# Altium PCB OTP4.PcbDoc
Units mil, origin at the board's own origin, x right, y up, seen from the top; angles counter-clockwise.
Board outline 2025 x 365 mil, 4 copper layers (Top Layer, Internal Plane 1, Internal Plane 2, Bottom Layer), stack 30.634 mil thick; 24 components, 20 nets, 111 pads, 25 vias.
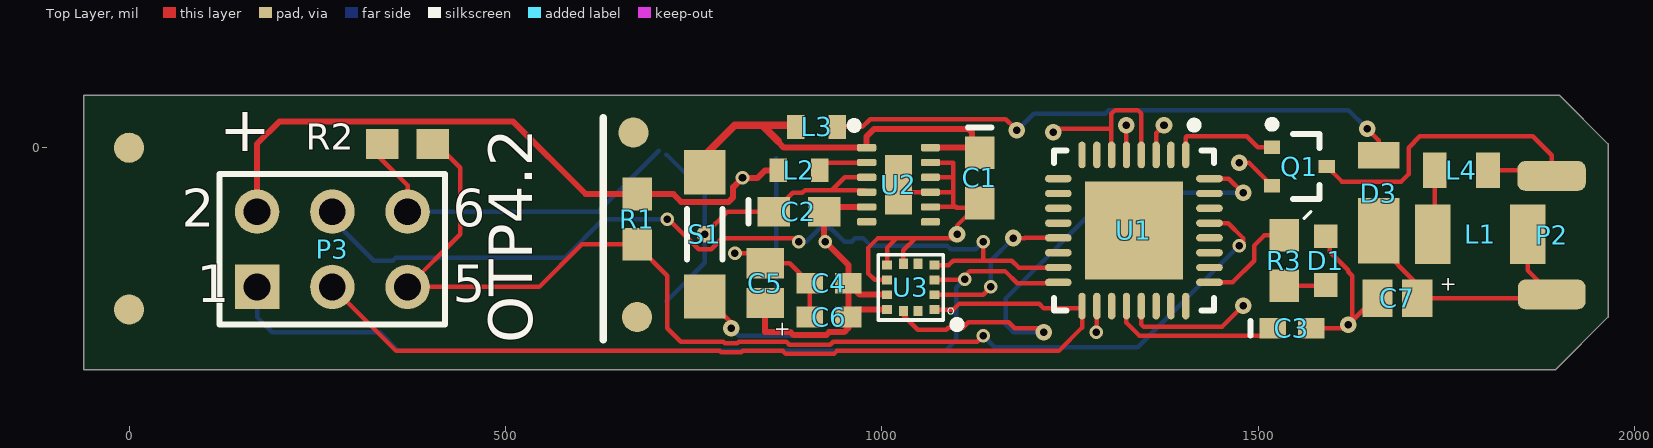
[diagram p0: Top Layer view]
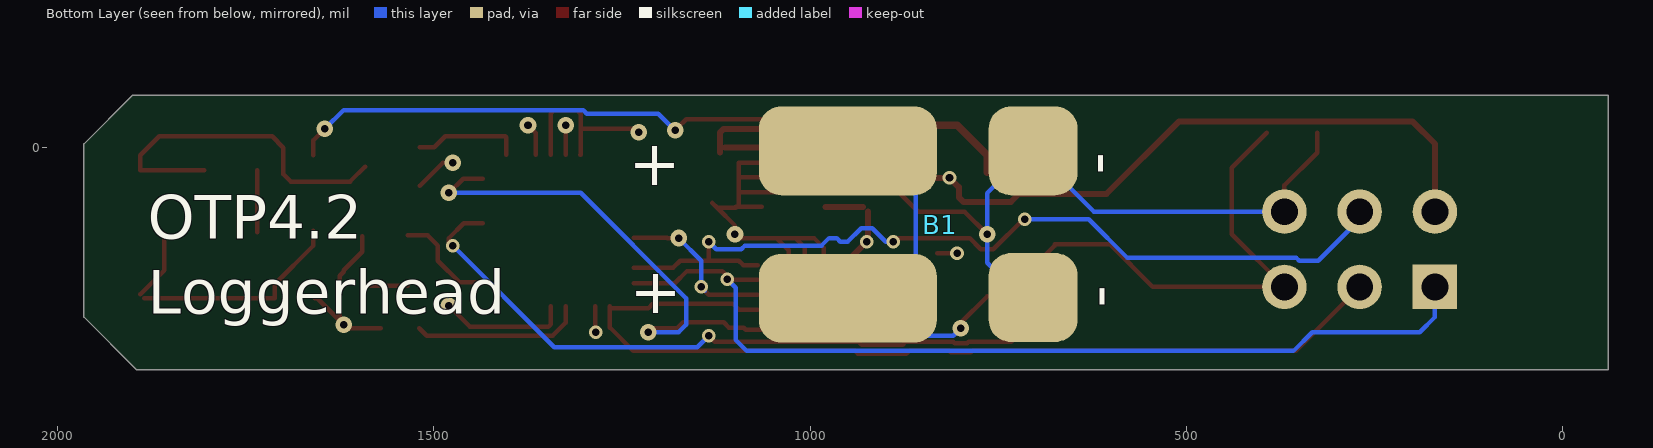
[diagram p1: Bottom Layer view, seen from below]
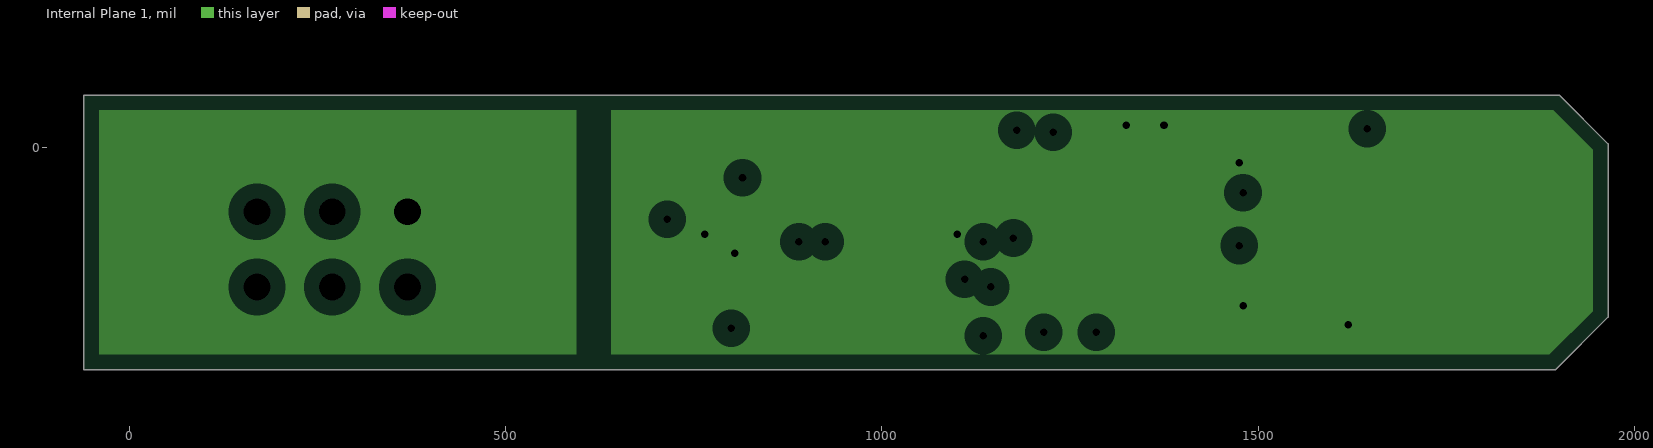
[diagram p2: Internal Plane 1, clearances drawn from the general rule]
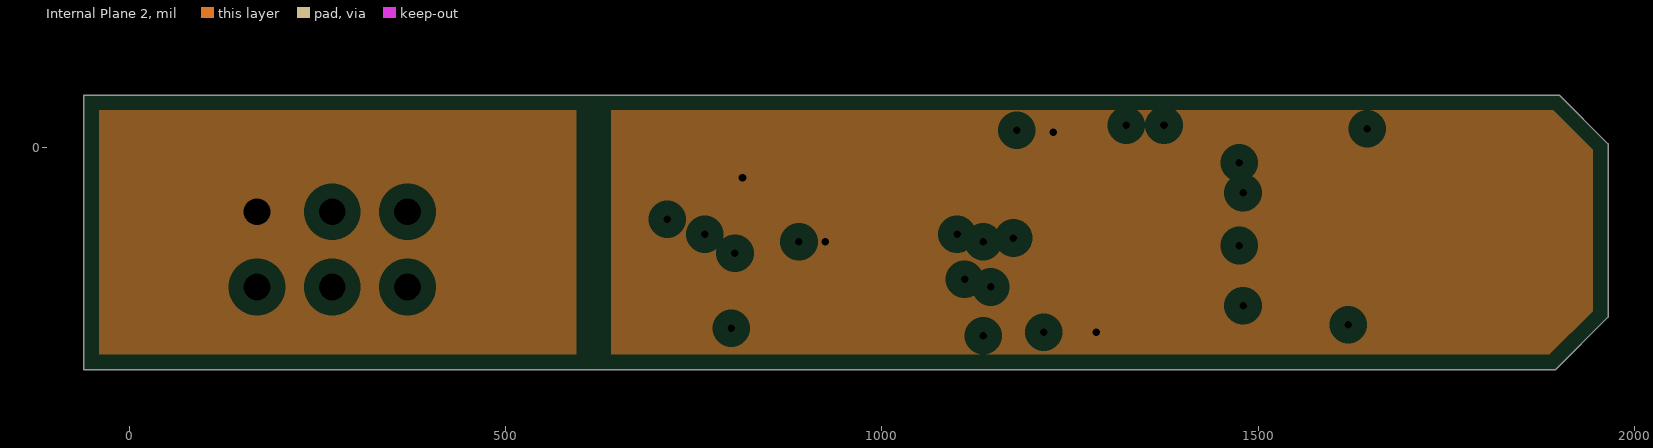
[diagram p3: Internal Plane 2, clearances drawn from the general rule]

## Layer stack, top to bottom
Top Solder: solder mask 0.4, Solder Resist, Dk 3.5
Top Layer: signal copper 1.4
Dielectric 1: core 10, FR-4, Dk 4.2
Internal Plane 1: plane copper 1.417, net GND
Dielectric 3: prepreg 5, Dk 4.2
Internal Plane 2: plane copper 1.417, net V1.8
Dielectric 2: core 10, Dk 4.2
Bottom Layer: signal copper 1.4
Bottom Solder: solder mask 0.4, Solder Resist, Dk 3.5

## Board outline
-60.11,-294.91 1894.89,-294.91 1964.89,-224.9 1964.89,5.1 1899.89,70.09 -60.11,70.09

## Design rules (kind name [scope] priority, off if disabled: settings)
Clearance [All] p1: gap=6
PlaneClearance [All] p1: clearance=20
PlaneConnect [All] p1: planeconnectstyle=Relief reliefexpansion=20 reliefentries=4 reliefconductorwidth=10 reliefairgap=10
PolygonConnect [All] p1: connectstyle=Relief reliefconductorwidth=10 reliefentries=4 polygonreliefangle="90 Angle" airgapwidth=10
RoutingVias [All] p1: holewidth=11 width=22 viastyle="Through Hole" minholewidth=8 minwidth=12 maxholewidth=28 maxwidth=50
SolderMaskExpansion [All] p1: expansion=4
Width [All] p1: maxlimit=50 minlimit=6 preferedwidth=6
27 further rules are at their usual default settings.

## Components (designator, comment, footprint, x,y, rotation, side; value= is the part's Value field where it differs from the comment)
B1 "Pin Battery" Battery_Pin 949.89,-199.91 r0 bottom
C1 "C0603" 0603 1129.89,-39.91 r270 top
C2 "C0603" 0603 889.89,-84.9 r0 top
C3 "0.1uF" 0402 1544.89,-239.91 r0 top
C4 "100nF" 0402 929.89,-179.91 r180 top
C5 "10uF" Tant0805 844.89,-179.91 r270 top
C6 "100nF" 0402 929.89,-224.91 r180 top
C7 "47uF" Tant0805 1684.89,-199.91 r0 top
D1 "LED_0603" Diode0603 1589.89,-149.91 r90 top
D3 "Shottky" DFLS130 1659.89,-74.9 r90 top
L1 "390uH" Inductor_NLV32T 1794.89,-114.91 r180 top
L2 "2.2uH" "Inductor KLZ1608AHR" 889.89,-29.9 r0 top
L3 "47uH" "Inductor KLZ1608AHR" 913.32,27.62 r0 top
L4 "22uH" "Inductor MLZ2012M220WT000" 1769.89,-29.91 r0 top
P2 "PIEZO" PIEZO 1889.89,-194.91 r0 top
P3 "AVR SPI" HDR2X3 169.89,-184.9 r0 top
Q1 "PMF250XN,115" NXP-SOT323_N 1554.89,-24.9 r0 top
R1 "10k" 3-0603 674.89,-94.91 r90 top
R2 "omit" 3-0603 369.89,5.09 r180 top
R3 "330" 3-0603 1534.89,-149.91 r270 top
S1 "Reed_MK24" "Reed MK24-B-3" 764.89,-114.9 r90 top
U1 "ATmega8-16AC" 32M1-A_M 1334.89,-109.91 r270 top
U2 "TPS62740" TPS6274x 979.89,0.09 r0 top
U3 "LIS2DS12" LGA-12 1069.89,-214.9 r180 top

## Footprints (in the part's own frame and the unit in brackets; to place one, negate y for a bottom-side part, rotate by r counter-clockwise, add the part's x,y. Pads: shape width x height; smd on the part's side, far side on the other; paste and mask are expansions set on the pad)
3-0603 [mm] "Chip Resistor; Body 1.6 x 0.9 mm (LxW typ)"
  rect 1.1x1 smd: 1(-0.85,0) 2(0.85,0)
32M1-A_M [mm] "QFN, 32-Leads, Body 5x5mm, Pitch 0.5mm, Thermal Pad 3.3x3.3mm, IPC Low Density"
  oval 0.9x0.25 smd: 1(-2.55,1.75) 2(-2.55,1.25) 3(-2.55,0.75) 4(-2.55,0.25) 5(-2.55,-0.25) 6(-2.55,-0.75) 7(-2.55,-1.25) 8(-2.55,-1.75) 17(2.55,-1.75) 18(2.55,-1.25) 19(2.55,-0.75) 20(2.55,-0.25) 21(2.55,0.25) 22(2.55,0.75) 23(2.55,1.25) 24(2.55,1.75)
  oval 0.25x0.9 smd: 9(-1.75,-2.55) 10(-1.25,-2.55) 11(-0.75,-2.55) 12(-0.25,-2.55) 13(0.25,-2.55) 14(0.75,-2.55) 15(1.25,-2.55) 16(1.75,-2.55) 25(1.75,2.55) 26(1.25,2.55) 27(0.75,2.55) 28(0.25,2.55) 29(-0.25,2.55) 30(-0.75,2.55) 31(-1.25,2.55) 32(-1.75,2.55)
  rect 3.3x3.3 smd: 33(0,0)
  silkscreen extent -3.68,-2.7 2.7,2.7, body extent -2.55,-2.55 2.55,2.55, height 1
0402 [mm] "Chip Capacitor; Body 1.0 x 0.5 mm (LxW typ)"
  rect 0.9x0.7 smd: 1(-0.65,0) 2(0.65,0)
  silkscreen extent -1.4,-0.25 -1.4,0.25
0603 [mm] "Chip Capacitor; Body 1.6 x 0.8 mm (LxW typ)"
  rect 1.1x1 smd: 1(-0.85,0) 2(0.85,0)
  silkscreen extent -1.7,-0.4 -1.7,0.4
Battery_Pin [mm]
  rrect50% 3x3 smd: 0(-6.25,-4.975) 0(-6.25,-0.025)
  rrect50% 6x3 smd: 1(0,-4.975) 1(0,0)
  body extent -8.92,-6.6 26.92,1.54, height 3.98
DFLS130 [mm] "Diode"
  rect 0.9x1.4 smd: A(1.65,0)
  rect 2.2x1.4 smd: K(-0.9,0)
Diode0603 [mm]
  rect 0.8x0.8 smd: A(-0.825,0) K(0.825,0)
  silkscreen extent 1.42,0.51 1.65,0.74
HDR2X3 [mm] "Connector; Header; 3x2 Position"
  rect 1.5x1.5 hole 0.9: 1(0,0)
  round 1.5 hole 0.9: 2(0,2.54) 3(2.54,0) 4(2.54,2.54) 5(5.08,0) 6(5.08,2.54)
  silkscreen extent -1.27,-1.27 6.35,3.81
"Inductor KLZ1608AHR" [mm]
  rect 0.6x0.8 smd: 1(-0.7,0) 2(0.7,0)
"Inductor MLZ2012M220WT000" [mm]
  rect 0.8x1.2 smd: 1(-0.9,0) 2(0.9,0)
Inductor_NLV32T [mm]
  rect 1.2x2 smd: 1(-1.6,0) 2(1.6,0)
LGA-12 [mm] "LIS2DS12"
  rect 0.35x0.3 smd: 1(0,0) 2(0,-0.5) 3(0,-1) 4(0,-1.5) 7(1.6,-1.5) 8(1.6,-1) 9(1.6,-0.5) 10(1.6,0)
  rect 0.3x0.35 smd: 5(0.55,-1.55) 6(1.05,-1.55) 11(1.05,0.05) 12(0.55,0.05)
  silkscreen extent -0.65,-1.85 1.9,0.35
NXP-SOT323_N [mm] "SOT23, 3-Leads, Body 2.2x1.35mm, Pitch 0.65mm, IPC Medium Density"
  rect 0.55x0.45 smd: 1(-0.925,0.65) 2(-0.925,-0.65) 3(0.925,0)
  silkscreen extent -1.05,-1.1 0.67,1.55, body extent -0.67,-1.1 0.67,1.1, height 1.1
PIEZO [mm]
  rrect50% 2.286x1 smd: 1(0,0)
  rrect50% 2.305x1 smd: 2(0,4)
"Reed MK24-B-3" [mm] "Meder Reed Switch Surface Mount"
  rect 1.5x1.4 smd: 1(-2.1,0) 2(2.1,0)
  silkscreen extent -0.85,-0.6 0.85,0.6, body extent -2.75,-1.1 2.75,1.1, height 1.8
Tant0805 [mil]
  rect 40x50 smd: 1(-26.5,0) 2(26.5,0)
TPS6274x [mm] "QFN, 12-Leads, Body 2.00x3.00mm, Pitch 0.50mm, Thermal Pad 0.90x2.00mm, IPC Medium Density"
  rrect50% 0.65x0.25 smd: 1(0,0) 2(0,-0.5) 3(0,-1) 4(0,-1.5) 5(0,-2) 6(0,-2.5) 7(2.15,-2.5) 8(2.15,-2) 9(2.15,-1.5) 10(2.15,-1) 11(2.15,-0.5) 12(2.15,0)
  rect 0.9x2 smd paste-0.1: 13(1.075,-1.25)
  silkscreen extent -0.55,0.63 -0.3,0.87, body extent 0.03,-2.8 2.12,0.3, height 0.8

## Part data
B1: library part Battery_Pin
C1 C2: "Ceramic Chip Capacitor - Standard"
C3 C4 C6: library part C0402, "Ceramic Chip Capacitor - Standard"
C5 C7: library part Tant0805
D3: library part DFLS130
L1: library part Inductor_NLV32T
L2 L3: library part "Inductor KLZ1608"
L4: library part "Inductor MLZ2012M220WT000"
P3: library part "Header 3X2", "Header, 3-Pin, Dual row"
Q1: "N-Channel Trench MOSFET, 30 V, 0.9 A, -55 to 150 degC, 3-Pin SOT323, Tape and Reel"
R1 R2 R3: library part ERJ3RK, "Precision Thick Film Chip Resistor, 10 Ohm to 1M Ohm Range, 1% and 0.5% Tolerance, 0603 Size, 0.063 W"
U1: "8-Bit AVR Microcontroller with 8K Bytes of In-System Programmable Flash Memory"
U2: library part TPS6274x

## Free pads (board coordinates)
  round 40 smd paste-20 mask+5: 0(-0.11,-214.9) 0(-0.11,0.1) 0(669.89,20.1) 0(674.89,-224.9)

## Via types
v1: diameter 22, hole 10, Top Layer to Bottom Layer, 14 vias
v2: diameter 18, hole 10, Top Layer to Bottom Layer, 11 vias

## Nets (pads, with @x,y where several pads share a name; then routed paths per layer and width w, separated by ;. In a path a pad name is that pad's centre, name@x,y a point inside that pad or via, vN(x,y) a via of type N, cw(c..) or ccw(c..) an arc to the next point about the centre after c; other vN are vias at no path point)
BAT: C1.1 L3.1 S1.2 U2.1 U2.12 | length 545.8
  Top Layer w8: 862.33,8.82 862.33,7.65 869.89,0.09 U2.1 979.89,15.09 989.89,25.09 1114.89,25.09 1119.89,20.09 C1.1@1119.89,-6.44 ; U2.12 C1.1@1113.36,0.09
  Top Layer w10: S1.2 764.89,-9.9 804.89,30.09 841.06,30.09 ; 862.33,8.82 841.06,30.09 ; L3.1@883.29,30.09 841.06,30.09
CS: U1.13 U3.2 | length 223.8
  Top Layer w6: U3.2 1134.58,-195.22 v2(1144.89,-184.91) ; v1(1174.89,-119.91) 1189.89,-119.91 1189.74,-119.75 U1.13
  Bottom Layer w6: v2@1139.89,-189.91 v2(1144.89,-184.91) 1144.89,-149.91 v1(1174.89,-119.91)
DTR: P3.5 R1.1 R2.1 U1.29 | length 1610.3
  Top Layer w6: R2.1@393.36,20.1 439.89,-26.44 439.89,-114.91 P3.5 544.89,-184.9 601.43,-128.37 R1.1 674.89,-129.91 714.89,-169.91 714.89,-239.91 732.89,-257.91 789.61,-257.91 791.61,-259.91 808.18,-259.91 810.18,-257.91 873.28,-257.91 877.06,-261.68 931.55,-261.68 935.33,-257.91 1126.89,-257.91 v2(1134.89,-249.91) ; U1.29 1460.05,-100.06 1479.89,-119.91 v2@1479.89,-129.91
  Bottom Layer w6: v2(1134.89,-249.91) 1149.89,-264.91 1339.89,-264.91 v2(1474.89,-129.91)
GND: B1.0 C1.2 C2.1 C3.2 C4.2 C5.1 C6.2 C7.1 D1.K P3.6 Q1.2 R2.2 U1.3 U1.5 U1.21 U2.3 U2.4 U2.8 U2.9 U2.10 U2.11 U3.6 U3.7 U3.8 | length 2282.9
  Top Layer w6: R2.2@326.43,20.1 326.43,-6.44 369.89,-49.91 P3.6 ; v1(764.89,-114.91) 794.89,-84.9 C2.1 881.43,-59.91 894.29,-59.91 897.98,-56.22 933.58,-56.22 ; v2(804.89,-139.91) C5.1@831.39,-139.91 ; C5.1 877.8,-153.41 C4.2 C6.2 ; U2.4 977.15,-56.22 933.58,-56.22 ; U2.3 950.52,-39.28 933.58,-56.22 ; U3.8 990.52,-175.53 982.2,-167.21 982.2,-132.6 994.89,-119.91 1019.89,-119.91 ; U3.7 1006.9,-132.9 1019.89,-119.91 ; U3.6 1028.55,-136.24 1044.89,-119.91 ; 1032.06,-58.96 U2.9 1093.63,-58.96 ; U2.8 1094.58,-78.65 ; U2.10 1093.95,-39.28 ; U2.11 1094.58,-19.59 1094.58,-78.65 ; 1098.95,-79.59 C1.2@1123.67,-79.59 ; 1098.95,-78.65 1094.58,-78.65 ; C1.2 C1.2@1123.67,-79.59 ; v1(1324.89,30.09) 1319.89,30.09 1325.05,24.94 U1.5 ; U1.21 1344.74,-234.75 1347.74,-237.75 1452.05,-237.75 v1(1479.89,-209.91) ; U1.3 1364.42,19.62 v1(1374.89,30.09) v1@1374.89,35.09 ; v1(1474.89,-19.91) 1487.89,-19.91 Q1.2 ; C3.2 1614.89,-239.91 v1@1624.89,-229.91 ; D1.K@1594.89,-117.42 1594.89,-138.16 1619.64,-162.91 1619.64,-164.65 1624.89,-169.91 v1@1624.89,-229.91 ; C7.1 1654.89,-199.91 v1@1624.89,-229.91 ; 1019.89,-119.91 1044.89,-119.91 ; 1044.89,-119.91 1099.89,-119.91 1099.89,-103.37 C1.2@1123.67,-79.59
  Bottom Layer w6: P3.6 622.96,-84.9 B1.0@703.83,-4.04 ; B1.0@713.83,-203.92 764.89,-152.86 v1(764.89,-114.91) 764.89,-60.1 B1.0@713.83,-9.04
  other v1: 1619.89,-234.91 1099.89,-114.91
HVDD: C7.2 D3.K L1.1 P2.1 | length 377.7
  Top Layer w6: D3.K 1659.89,-129.91 1711.39,-181.41 C7.2 P2.1@1884.89,-199.91 ; L1.1 1857.89,-162.9 P2.1
INT1: U3.12
INT2: U1.32 U3.11 | length 724.1
  Top Layer w6: U3.11 1028.55,-222.71 1047.65,-241.81 1085.48,-241.81 1088.39,-238.9 1107.86,-238.9 1114.86,-231.91 1168.61,-231.91 1176.61,-239.91 1209.89,-239.91 v1(1214.89,-244.91) ; U1.32 1461,-41.01 v1(1479.89,-59.9)
  Bottom Layer w6: v1(1214.89,-244.91) 1174.89,-244.91 1164.89,-234.91 1164.89,-199.91 1304.89,-59.91 v1(1479.89,-59.9)
LED1: R3.1 U1.25 | length 137.2
  Top Layer w6: U1.25 1466,-178.8 1494.89,-149.91 1494.89,-129.91 1508.36,-116.44 R3.1
MISO: P3.1 U1.16 U3.3 | length 1254.9
  Top Layer w6: U3.3 1105.05,-175.53 1116.77,-163.81 1163.64,-163.81 1179.74,-179.91 U1.16@1234.5,-179.91
  Bottom Layer w6: P3.1 169.89,-224.91 189.89,-244.91 332.92,-244.91 357.92,-269.91 1084.46,-269.91 1099,-255.36 1099,-185.8 v2(1109.89,-174.91)
MOSI: P3.4 U1.15 U3.4 | length 1163.6
  Top Layer w6: v2(714.89,-94.91) 716.61,-94.91 756.61,-134.91 773.18,-134.91 788.18,-119.91 884.89,-119.91 v2(889.89,-124.91) ; U3.4 1088.95,-155.85 1094.89,-149.91 1134.89,-149.91 ; v2(1134.89,-124.91) 1134.89,-149.91 ; U1.15 1182.01,-159.12 1172.8,-149.91 1134.89,-149.91
  Bottom Layer w6: P3.4 269.89,-94.91 324.89,-149.91 350.41,-149.91 353.94,-146.38 578.46,-146.38 629.93,-94.91 v2@709.89,-94.91 ; v2(889.89,-124.91) 899.44,-124.91 917.44,-106.91 932.35,-106.91 950.35,-124.91 959.89,-124.91 964.89,-119.91 974.89,-119.91 984.89,-129.91 1086.61,-129.91 1091.61,-134.91 1124.89,-134.91 v2(1134.89,-124.91)
NetB1_1: B1.1 S1.1 | length 371.8
  Top Layer w6: S1.1 799.89,-232.58 v1(799.89,-239.91)
  Bottom Layer w6: v1(799.89,-239.91) 809.89,-249.91 B1.1@914.89,-249.91 ; B1.1@859.89,-209.91 B1.1@859.89,-14.04
NetC3_1: C3.1 U1.20 | length 227.7
  Top Layer w6: U1.20 1325.05,-232.48 1342.31,-249.75 1509.46,-249.75 C3.1
NetD1_A: D1.A R3.2 | length 59
  Top Layer w6: R3.2 D1.A@1593.91,-183.37
NetD3_A: D3.A L3.2 | length 784.3
  Top Layer w6: L3.2 974.04,27.62 984.51,38.09 1164.52,38.09 1174.89,27.72 v1@1174.89,20.09 ; v1(1644.89,25.09) 1659.89,10.09 D3.A
  Bottom Layer w6: v1@1174.89,20.09 1176.8,20.09 1201.8,45.09 1296.61,45.09 1301.61,50.09 1619.89,50.09 v1(1644.89,25.09)
  other v1: 1179.36,23.26
NetL1_2: L1.2 L4.1 | length 82.4
  Top Layer w6: L1.2@1734.46,-112.35 L4.1
NetL2_2: L2.2 U2.2 | length 52.1
  Top Layer w6: L2.2@927.77,-19.59 U2.2
PIEZO: L4.2 P2.2 Q1.3 | length 467.1
  Top Layer w6: Q1.3 1611.31,-44.91 1689.89,-44.91 1699.89,-34.91 1699.89,0.09 1714.89,15.09 1864.89,15.09 1889.89,-9.91 1889.89,-29.91 L4.2
PWM: Q1.1 U1.1 | length 144.6
  Top Layer w6: U1.1 1403.79,13.99 1404.89,15.09 1484.89,15.09 1499.3,0.69 Q1.1
SCK: P3.3 U1.17 U3.1 | length 1276.4
  Top Layer w6: P3.3 354.89,-269.91 784.64,-269.91 786.64,-271.91 813.15,-271.91 815.15,-269.91 868.31,-269.91 872.09,-273.68 936.52,-273.68 940.3,-269.91 1234.89,-269.91 1266,-238.8 U1.17 ; U3.1 1094.89,-214.9 1102.58,-207.22 1208.96,-207.22 1214.89,-213.15 U1.17@1263.14,-213.15
V1.8: C2.2 C4.1 C5.2 C6.1 L2.1 P3.2 R1.2 U1.4 U1.6 U1.18 U2.5 U3.9 U3.10 | length 1603.5
  Top Layer w6: v1@1229.89,25.09 1304.89,25.09 ; v2@1285.68,-249.12 U1.18 ; U1.6 1304.89,-9.04 1304.89,25.09 ; U1.4 1344.89,-9.35 1344.89,45.09 1339.89,50.09 1309.89,50.09 1304.89,45.09 1304.89,25.09
  Top Layer w8: P3.2 169.89,5.1 199.89,35.09 509.89,35.09 606.43,-61.44 R1.2 722.88,-61.44 733.19,-71.76 796.59,-71.76 802.45,-65.9 802.45,-52.35 v2(814.89,-39.91) 834.89,-39.91 844.89,-29.9 L2.1 ; C5.2 844.89,-244.91 878.66,-244.91 882.44,-248.68 926.16,-248.68 929.94,-244.91 949.89,-244.91 955.48,-239.31 C6.1 C4.1 ; C2.2 923.36,-123.37 v2(924.89,-124.91) 955.48,-155.5 C4.1 ; C2.2@929.62,-78.65 U2.5 ; C6.1@965.48,-214.9 U3.10 ; U3.9 970.8,-195.22 C4.1
  other v1: 1227.83,20.38
  other v2: 1284.89,-244.91
pads on no net: U1.2 U1.7 U1.8 U1.9 U1.10 U1.11 U1.12 U1.14 U1.19 U1.22 U1.23 U1.24 U1.26 U1.27 U1.28 U1.30 U1.31 U1.33 U2.6 U2.7 U2.13 U3.5

## Polygon pours and split planes (outlines as drawn)
GND on Internal Plane 1 (split plane): 1944.8,-3.23 1944.8,-216.58 1886.57,-274.81 639.89,-274.81 639.89,50 1891.57,50
GND on Internal Plane 1 (split plane): 594.89,-274.81 -40.01,-274.81 -40.01,50 594.89,50
V1.8 on Internal Plane 2 (split plane): 1944.8,-3.23 1944.8,-216.58 1886.57,-274.81 639.89,-274.81 639.89,50 1891.57,50
V1.8 on Internal Plane 2 (split plane): 594.89,-274.81 -40.01,-274.81 -40.01,50 594.89,50

## Other copper
Internal Plane 1 (plane layer: these items are gaps in the copper):
  pour cut-out: 594.89,70.09 639.89,70.09 639.89,-289.91 644.89,-294.91 594.89,-294.91
Internal Plane 2 (plane layer: these items are gaps in the copper):
  pour cut-out: 594.89,70.09 639.89,70.09 639.89,-294.91 594.89,-294.91

## Silkscreen, mask and mechanical layers (free items; w line width, h text height)
Top Overlay:
  circle w10: c1099.89,-234.9 r5
  lines w10: 629.89,-254.91 629.89,40.09
  text "+" at 119.89,-4.91 h60
  text "OTP4.2" at 554.89,-259.9 h100 r90
Bottom Overlay:
  text "-" at 636.53,-36.1 h60 r90
  text "+" at 1171.71,-49.71 h60
  text "OTP4.2" at 1879.89,-139.91 h100
  text "-" at 634.84,-212.71 h60 r90
  text "+" at 1170.84,-219.85 h60
  text "Loggerhead" at 1879.89,-239.91 h100
Mechanical 1:
  the board outline again, w10

## Text inside footprints (layer, text, board x,y; h text height)
C5: Top Overlay "+" at 859.89,-229.91 h19.68 r270
C7: Top Overlay "+" at 1741.12,-189.91 h19.68
P3: Top Overlay "6" at 429.89,-104.9 h50; Top Overlay "5" at 429.89,-204.9 h50; Top Overlay "2" at 69.89,-104.9 h50; Top Overlay "1" at 89.89,-204.9 h50